# Altium PCB PCB2.PcbDoc
Units mil, origin at the board's own origin, x right, y up, seen from the top; angles counter-clockwise.
Board outline 47.27 x 1417.11 mil, 2 copper layers (Top Layer, Bottom Layer); 15 components, 40 nets, 133 pads, 11 vias.
Unrouted connection lines stored in the file: 1.
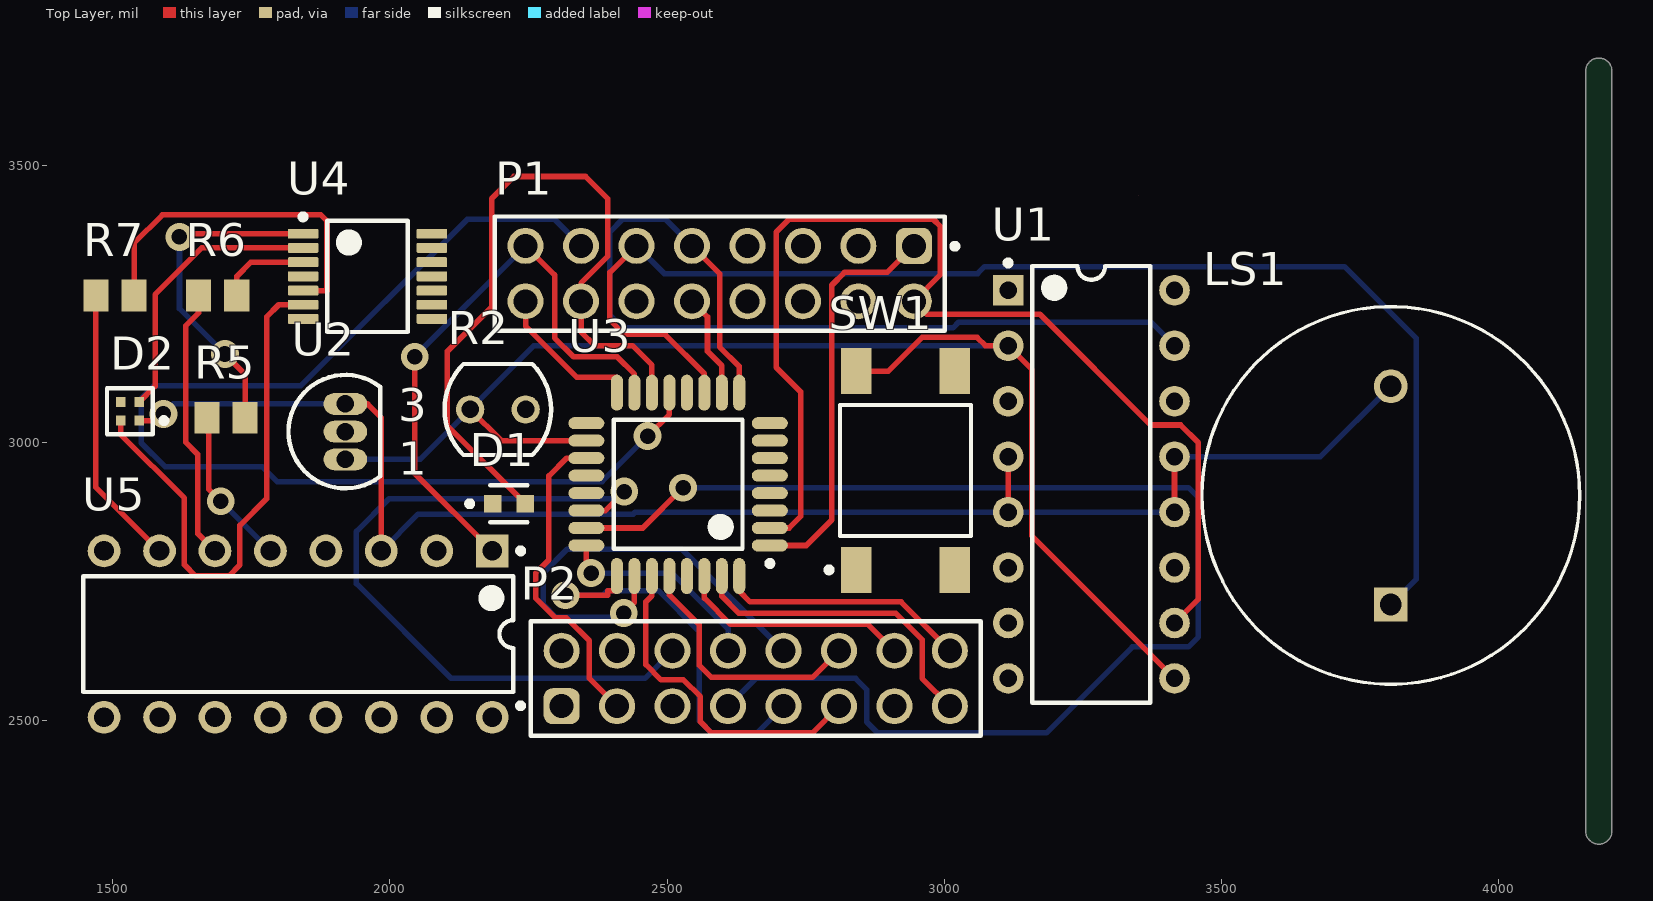
[diagram p0: Top Layer view]
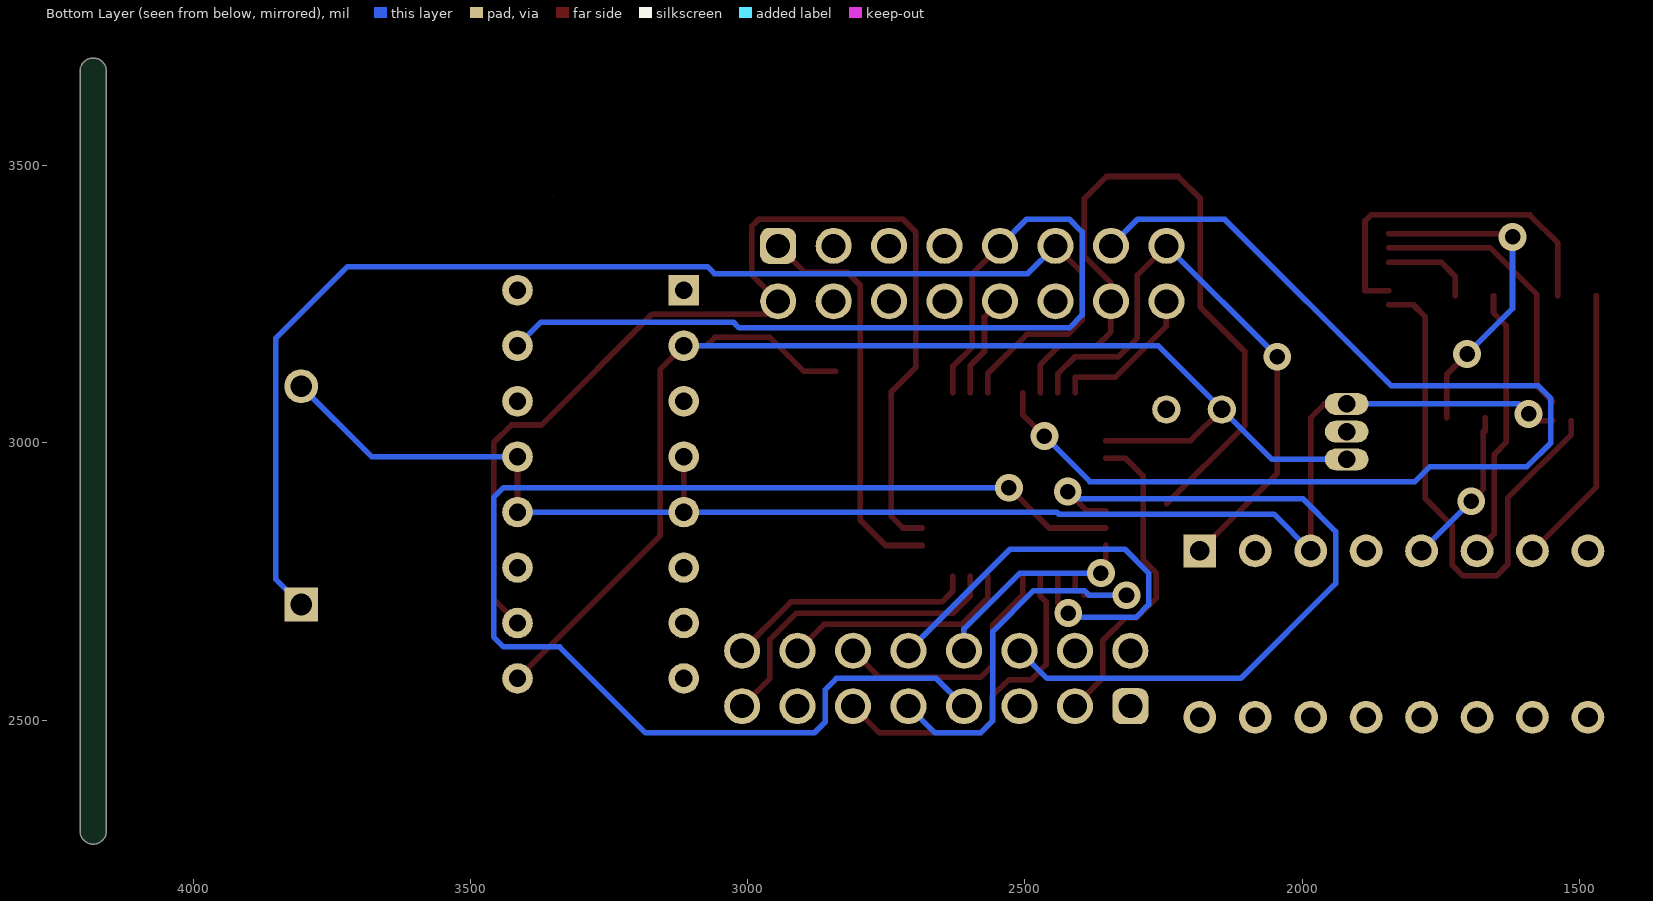
[diagram p1: Bottom Layer view, seen from below]

## Layer stack, top to bottom
Top Solder: solder mask 0.4, Solder Resist, Dk 3.5
Top Layer: signal copper 1.4
Dielectric 1: dielectric 12.6, FR-4, Dk 4.8
Bottom Layer: signal copper 1.4
Bottom Solder: solder mask 0.4, Solder Resist, Dk 3.5

## Board outline
4156.36,2300 4156.36,3670 cw(c4180,3670) 4203.64,3670 4203.64,2300 cw(c4180,2300)
cut-out: 3350,3445

## Design rules (kind name [scope] priority, off if disabled: settings)
Clearance [All] p1: gap=10 ignorepadtopadclearanceinfootprint=FALSE except(0: Arc-Hole Track-Hole SMDPad-Hole THPad-Hole Via-Hole Fill-Hole Poly-Hole Region-Hole Text-Hole)
PolygonConnect [All] p1: connectstyle=Relief reliefconductorwidth=10 reliefentries=4 polygonreliefangle="90 Angle" airgapwidth=10
RoomDefinition Sheet1 [InComponentClass('Sheet1')] p1: confinementstyle=ConfineIn formatcopy=TRUE lockcomponents=FALSE outline 1429.76,2455.35 4175,2455.35 4175,3415.35 1429.76,3415.35
RoutingVias [All] p1: holewidth=28 width=50 viastyle="Through Hole" minholewidth=28 minwidth=50 maxholewidth=28 maxwidth=50
SolderMaskExpansion [All] p1: expansion=4
Width [All] p1: maxlimit=10 minlimit=10 preferedwidth=10
30 further rules are at their usual default settings.

## Components (designator, comment, footprint, x,y, rotation, side; value= is the part's Value field where it differs from the comment)
D1 "LTST-C190GKT" FP-LTST-C190GKT-MFG 2215,2890 r0 top
D2 "SML-LX0404SIUPGUSB" FP-SML-LX0404SIUPGUSB-MFG 1531.73,3056.73 r180 top
LS1 "PS1720P02" FP-PS1720P02-MFG 3805,2905 r90 top
P1 "61301621121" 61301621121 2595,3305 r180 top
P2 "61301621121" 61301621121 2660,2575 r0 top
R2 "VT90N1" EXCE-VT90N1 2195,3060 r0 top
R5 "ERJ6ENF2200V" RESC2013X70X40NL20T20 1705,3045 r0 top
R6 "ERJ6ENF2200V" RESC2013X70X40NL20T20 1689.76,3265.35 r0 top
R7 "ERJ6ENF2200V" RESC2013X70X40NL20T20 1504.76,3265.35 r0 top
SW1 "FSM6JSMA" TECO-FSM6JSMA_V 2930,2950 r180 top
U1 "L293D" STM-L293D-16 3265,2925 r0 top
U2 "TMP36GT9Z" ADI-T-3 1920,3020 r0 top
U3 "ATmega8A-AU" 32A_N 2520,2925 r180 top
U4 "SN74HCT04PWT" PW0014A_N 1960,3300 r0 top
U5 "SN74HC139N" N0016A 1835,2655 r270 top

## Footprints (in the part's own frame and the unit in brackets; to place one, negate y for a bottom-side part, rotate by r counter-clockwise, add the part's x,y. Pads: shape width x height; smd on the part's side, far side on the other; paste and mask are expansions set on the pad)
32A_N [mm] "Thin QFP, 32-Leads, Body 7x7mm, Pitch 0.8mm, IPC Medium Density"
  oval 1.65x0.55 smd: 1(-4.2,2.8) 2(-4.2,2) 3(-4.2,1.2) 4(-4.2,0.4) 5(-4.2,-0.4) 6(-4.2,-1.2) 7(-4.2,-2) 8(-4.2,-2.8) 17(4.2,-2.8) 18(4.2,-2) 19(4.2,-1.2) 20(4.2,-0.4) 21(4.2,0.4) 22(4.2,1.2) 23(4.2,2) 24(4.2,2.8)
  oval 0.55x1.65 smd: 9(-2.8,-4.2) 10(-2,-4.2) 11(-1.2,-4.2) 12(-0.4,-4.2) 13(0.4,-4.2) 14(1.2,-4.2) 15(2,-4.2) 16(2.8,-4.2) 25(2.8,4.2) 26(2,4.2) 27(1.2,4.2) 28(0.4,4.2) 29(-0.4,4.2) 30(-1.2,4.2) 31(-2,4.2) 32(-2.8,4.2)
  silkscreen extent -4.33,-2.95 2.95,3.75, body extent -3.5,-3.5 3.5,3.5, height 1.2
61301621121 [mm] "Pin Header, pitch 2.54 mm, THT, Vertical, dual row, 16p"
  rrect50% 1.65x1.65 hole 1.1: 1(-8.89,-1.27)
  round 1.65 hole 1.1: 2(-8.89,1.27) 3(-6.35,-1.27) 4(-6.35,1.27) 5(-3.81,-1.27) 6(-3.81,1.27) 7(-1.27,-1.27) 8(-1.27,1.27) 9(1.27,-1.27) 10(1.27,1.27) 11(3.81,-1.27) 12(3.81,1.27) 13(6.35,-1.27) 14(6.35,1.27) 15(8.89,-1.27) 16(8.89,1.27)
  silkscreen extent -10.89,-2.61 10.31,2.61, body extent -10.16,-2.54 10.16,2.54, height 8.59
ADI-T-3 [mm] "TO, Flat Index; 3 In-Line, Axial Leads; Body Dia. 5.1mm; Leads 0.48 x 0.48 mm (max)"
  oval 2x1 hole 0.8: 1(0,-1.27) 2(0,0) 3(0,1.27)
  silkscreen extent -2.6,-2.6 1.6,2.6, body extent -2.6,-2.61 1.6,2.61, height 5.33
EXCE-VT90N1 [mm] "THD, 2-Leads, Body Width 4.17mm (Max), Height 2.29mm"
  round 1.3 hole 0.8: 1(-1.27,0) 2(1.27,0)
  silkscreen extent -2.44,-2.08 2.44,2.08, body extent -2.44,-2.09 2.44,2.09, height 2.29
FP-LTST-C190GKT-MFG [mm]
  rect 0.8x0.8 smd paste+0 mask+0: 1(-0.75,0) 2(0.75,0)
  silkscreen extent -1.92,-0.85 0.85,0.85, body extent -1.25,-0.55 1.25,0.55, height 0.25
FP-PS1720P02-MFG [mm]
  rect 1.55x1.55 hole 1 paste-1000 mask+0: 1(-5,0)
  round 1.55 hole 1 paste-1000 mask+0: 2(5,0)
  silkscreen extent -8.65,-8.65 8.65,8.65, body extent -8.75,-8.75 8.75,8.75, height 0.25
FP-SML-LX0404SIUPGUSB-MFG [mm]
  rect 0.45x0.45 smd paste+0 mask+0: 1(-0.425,0.425) 2(0.425,0.425) 3(0.425,-0.425) 4(-0.425,-0.425)
  silkscreen extent -1.68,-1.05 1.05,1.05, body extent -0.85,-0.85 0.85,0.85, height 0.25
N0016A [mm] "DIP, 16-Leads, Body 19.7x6.6mm, Pitch 2.54mm"
  rect 1.5x1.5 hole 0.9: 1(-3.81,8.89)
  round 1.5 hole 0.9: 2(-3.81,6.35) 3(-3.81,3.81) 4(-3.81,1.27) 5(-3.81,-1.27) 6(-3.81,-3.81) 7(-3.81,-6.35) 8(-3.81,-8.89) 9(3.81,-8.89) 10(3.81,-6.35) 11(3.81,-3.81) 12(3.81,-1.27) 13(3.81,1.27) 14(3.81,3.81) 15(3.81,6.35) 16(3.81,8.89)
  silkscreen extent -3.93,-9.85 2.65,10.32, body extent -3.95,-9.85 3.95,9.85, height 5.08
PW0014A_N [mm] "SOP, 14-Leads, Body 5.1x4.5mm, Pitch 0.65mm, IPC Medium Density"
  rrect22% 1.4x0.45 smd: 1(-2.95,1.95) 2(-2.95,1.3) 3(-2.95,0.65) 4(-2.95,0) 5(-2.95,-0.65) 6(-2.95,-1.3) 7(-2.95,-1.95) 8(2.95,-1.95) 9(2.95,-1.3) 10(2.95,-0.65) 11(2.95,0) 12(2.95,0.65) 13(2.95,1.3) 14(2.95,1.95)
  silkscreen extent -3.07,-2.55 1.85,2.85, body extent -3.21,-2.5 3.21,2.5, height 1
RESC2013X70X40NL20T20 [mm] "Chip Resistor, 2-Leads, Body 2.00x1.25mm, IPC Medium Density"
  rect 1.15x1.45 smd: 1(-0.875,0) 2(0.875,0)
  body extent -1.1,-0.72 1.1,0.72, height 0.7
STM-L293D-16 [mm] "DIP, 16-Leads, Body 20x6.85mm, Pitch 2.54mm"
  rect 1.4x1.4 hole 0.8: 1(-3.81,8.89)
  round 1.4 hole 0.8: 2(-3.81,6.35) 3(-3.81,3.81) 4(-3.81,1.27) 5(-3.81,-1.27) 6(-3.81,-3.81) 7(-3.81,-6.35) 8(-3.81,-8.89) 9(3.81,-8.89) 10(3.81,-6.35) 11(3.81,-3.81) 12(3.81,-1.27) 13(3.81,1.27) 14(3.81,3.81) 15(3.81,6.35) 16(3.81,8.89)
  silkscreen extent -3.93,-10 2.7,10.26, body extent -3.93,-10 3.93,10, height 5.1
TECO-FSM6JSMA_V [mm] "SMD, 4-Leads, Body 6x6mm, Pitch 4.5mm"
  rect 1.4x2.1 smd: 1(2.25,4.55) 2(2.25,-4.55) 3(-2.25,4.55) 4(-2.25,-4.55)
  silkscreen extent -3,-3 3.62,4.67, body extent -3,-5 3,5, height 7.11

## Part data
D1: library part CMP-22017-000005-2, "LED GREEN CLEAR CHIP SMD", Case/Package=0603, Case Code (Metric)=1608, Color=Green, Forward Current=30mA, Forward Voltage=2.1V, Lens Color=Colorless, Max Operating Temperature=85°C, Min Operating Temperature=-55°C, Package Quantity=1, Power Dissipation=100mW, Reverse Voltage=5V, Test Current=10mA, Voltage=2V, Case Code (Imperial)=0603, Depth=0.8mm, Dominant Wavelength=569nm, Height=0.8mm, Illumination Color=Green, Lead Free="Lead Free", Length=1.6mm, Lens Style=Clear, Lens Transparency=Clear, Luminous Intensity=6mcd, Mount="Surface Mount", Number of Elements=1, Number of LEDs=1, Number of Pins=2, Packaging="Tape and Reel", Power Rating=100mW, Radiation Hardening=No, Viewing Angle=130°, Wavelength=565nm, Width=0.8mm
D2: library part CMP-2000-07119-2, "LED RGB CLEAR SMD", Case/Package=0404, Case Code (Metric)=1010, Color=Blue, Forward Current=2mA, Forward Voltage=2.73V, Lens Color=Colorless, Max Operating Temperature=85°C, Min Operating Temperature=-40°C, Package Quantity=2000, Power Rating=30mW, Case Code (Imperial)=0404, Height=0.3mm, Lead Free="Lead Free", Length=1mm, Lens Style=Square, Lens Transparency=Clear, Luminous Intensity=20mcd, Mount="Surface Mount", Number of LEDs=3, Packaging="Tape and Reel", REACH SVHC="No SVHC", Test Current=2mA, Viewing Angle=120°, Wavelength=465nm, Width=1mm
LS1: library part CMP-08413-000001-1, "AUDIO PIEZO TRANSDUCER 30V TH", Frequency=2kHz, Manufacturer="TDK Corporation", Package=0, Temperature="-10°C to +70°C", Temperature Range High=+70°C, Temperature Range Low=-10°C, Automotive=No, Category=Speak, ComponentLink2Description=Datasheet, ComponentLink2URL=https://product.tdk.com/info/en/catalog/datasheets/piezoelectronic_buzzer_ps_en.pdf, Device Class L1=Electromechanical, Device Class L2="Audio Products", Device Class L3=Buzzers, Digikey Description="AUDIO PIEZO TRANSDUCER 30V TH", Height=8.3mm, Lead Free=Yes, Manufacturer Part Number=PS1720P02, Mouser Description="Audio Indicators & Alerts Round 17mmx8mm 2 kHz Vin=3V", Octopart=https://octopart.com/ps1720p02-tdk-154429, RoHS=TRUE, Standoff Height=0.5mm
P1 P2: library part CMP-1502-01097-3, Color=Black, Contact Resistance=20m?, Current Rating=3A, Max Operating Temperature=105°C, Min Operating Temperature=-40°C, Operating Supply Voltage=250V, Connector Type="Male Pin", Contact Material=Copper, Contact Mating Length=5.9944mm, Contact Plating=Gold, Gender=Male, Height=8.89mm, Lead Pitch=2.54mm, Mount="Through Hole", NexarPartId=32855550, Number of Contacts=16, Number of Pins=16, Number of Positions=16, Number of Rows=2, Orientation=Vertical, Packaging=Bulk, Pitch=2.54mm, REACH SVHC=Unknown, RoHS=Compliant, Row Spacing=2.54mm, Termination=Solder, Voltage Rating=250V
R2: library part CMP-2000-07406-1, "Photoconductive Resistor, 200 kOhm, 100 V, 80 mW, -40 to 75 degC, 2-Pin THD, RoHS", Dark Resistance=200kohm, Manufacturer="Excelitas Technology", Operating Temperature Max=75°C, Operating Temperature Min=-40°C, Package Description="2-Pin Through Hole Device, Body Width 4.17 mm (Max), Height 2.29 mm", Power Rating=80mW, Resistance @ Lux=12kohm, Resistor Case Style=-, Voltage Rating=100V, Datasheet URL=http://datasheet.octopart.com/VT90N1-Excelitas-datasheet-10388451.pdf, Datasheet Version=09/2006, Manufacturer URL=http://www.excelitas.com/Pages/Index.aspx, Mounting Technology=ThroughHole, Package Reference=VT90N1, Packaging=Each, Product Range=-, SVHC=Cadmiumchloride(15-Jun-2015)
R5 R6 R7: library part CMP-2001-00044-1, Manufacturer=Panasonic, Part Number=ERJ6ENF2200V
SW1: library part CMP-2000-07503-1, "Switch, SPST, 24 V, -35 to 85 degC, 4-Pin SMD, RoHS, Tape and Reel", Case\/Package=SMD/SMT, Contact Current Rating=50mA, Contact Resistance=100mOhm, Insulation Resistance=100MOhm, Manufacturer="TE Connectivity", Max Operating Temperature=85degC, Max Voltage Rating (DC)=12V, Min Operating Temperature=-35degC, Operating Force=1.57N, Package Description="4-Pin Surface Mount Device, Body 6 x 6 mm, Pitch 4.5 mm", Package Quantity=750, Voltage Rating=24V, Actuator Length=3.4mm, Actuator Material=Polyamide, Contact Material=CopperAlloy, Contact Plating=Silver, Current Rating=50mA, Datasheet URL=http://www.te.com/commerce/DocumentDelivery/DDEController?Action=showdoc&DocId=Customer+Drawing%7F2-1437565-7%7FV%7Fpdf%7FEnglish%7FENG_CD_2-1437565-7_V.pdf%7F4-1437565-9, Datasheet Version="Rev. V, 02/2015", Electrical Life=100000Cycles, ELV=Compliant, Illumination Type=Illuminated, Lead Free=LeadFree, Length=6mm, Manufacturer URL=http://www.te.com/, Mechanical Life=100000Cycles, Mount=SurfaceMount, Mounting Technology=SurfaceMount, Orientation=Straight, Package Reference=FSM6JSMA, Packaging=LoosePiece, REACH SVHC=Unknown, RoHSCompliant=true, Switch Travel=0.25mm, Termination=GullWing, Throw Configuration=SPST, Voltage Rating (DC)=24V, Width=6mm
U1: library part CMP-2000-06524-1, "Push-Pull Four Channel Driver with Diode, 4.5 to 36 V, -40 to 150 degC, 16-Pin PDIP, RoHS, Tube", Current - Output / Channel=600mA, Current - Peak Output=1.2A, Manufacturer=STMicroelectronics, On-State Resistance=-, Operating Temperature=-40°C~150°C, Package / Case="16-DIP(0.300\",7.62mm)", Package Description="16-Pin Thru-Hole Dual-In-Line, Body 20 x 6.85 mm, Pitch 2.54 mm", Package Reference=DIP-16, Standard Package=25, Supplier Device Package=16-PowerDIP, Voltage - Supply=4.5V~36V, Category=IntegratedCircuits(ICs), Datasheet URL=http://www.st.com/st-web-ui/static/active/en/resource/technical/document/datasheet/CD00000059.pdf, Datasheet Version=07/2003, Dynamic Catalog=HalfBridge, Family=PMIC-MOSFET,BridgeDrivers-InternalSwitch, Input Type=Non-Inverting, Manufacturer URL=http://www.st.com/, Mounting Technology=ThroughHole, Mounting Type=ThroughHole, Number of Outputs=4, Other Names=497-2936-5, Other Related Documents=L293DViewAllSpecifications, Packaging=Tube, PartNumber=L293D, Series=-, Type=HalfBridge
U2: library part CMP-0887-00067-1, "Low Voltage Temperature Sensor, 2.7 to 5.5 V Supply, Industrial, 3-pin TO92 (T-3), Tray", Manufacturer="Analog Devices", Supply Voltage Range="2.7 to 5.5 V", Code_JEDEC=TO-226-AA, ComponentLink1Description="Manufacturer URL", ComponentLink1URL=http://www.analog.com/en/index.html, ComponentLink2Description=Datasheet, ComponentLink2URL=http://www.analog.com/static/imported-files/data_sheets/TMP35_36_37.pdf, ComponentLink3Description="Package Specification", ComponentLink3URL=http://www.analog.com/static/imported-files/packages/PKG_PDF/TO-92(T)/T_3.pdf, ComponentLink4Description="Product URL", ComponentLink4URL=http://www.analog.com/en/mems-sensors/digital-temperature-sensors/tmp36/products/product.html, DatasheetVersion="Rev. F", Mounting Technology="Through Hole", PackageDescription="3-Pin Plastic Header-Style Package, 1.27 mm Pitch", PackageReference=T-3, PackageVersion="042208-A, 04/2008", Packing=Tray, PartNumber=TMP36GT9Z
U3: library part CMP-0095-00219-2, "8-bit AVR Microcontroller, 2.7-5.5V, 16MHz, 8KB Flash, 512 Bytes EEPROM, 1KB SRAM, 32-pin TQFP, Industrial Grade (-40°C to 85°C)", Code_JEDEC=MS-026-ABA, ComponentLink1Description="Manufacturer URL", ComponentLink1URL=http://www.atmel.com/, ComponentLink2Description="ATmega8A Datasheet", ComponentLink2URL=http://www.atmel.com/dyn/resources/prod_documents/doc8159.pdf, ComponentLink3Description="ATmega8A Summary", ComponentLink3URL=http://www.atmel.com/dyn/resources/prod_documents/8159S.pdf, DatasheetVersion="revD, Feb-2011", PackageDescription="32-Lead, 7x7x1.0 mm Body, 0.8mm Lead Pitch, Thin Profile Plastic Quad Flat Package (TQFP)", PackageReference=32A, PackageVersion="revC, Oct-2010", RevisionNote="DatasheetVersion & PackageVersion updated. URLs added."
U4: library part CMP-1615-00087-3, "Hex Inverters, PW0014A, SMALL T&R", F @ Nom Voltage(Max)(Mhz)=25, Generic Part Number=SN74HCT04, ICC @ Nom Voltage(Max)(mA)=0.02, Manufacturer="Texas Instruments", Operating Temperature Range(C)="-40 to 85", Rating=Catalog, tpd @ Nom Voltage(Max)(ns)=23, Voltage(Nom)(V)=5, Bits(#)=6, Code_JEDEC=MO-153, DatasheetVersion=SCLS042D, Input Type=TTL, Output Drive (IOL/IOH)(Max)(mA)=-4/4, Output Type=CMOS, PackageReference=PW0014A, Schmitt Trigger=No, Technology Family=HCT, VCC(Max)(V)=5.5, VCC(Min)(V)=4.5
U5: library part CMP-1633-00660-2, "Dual 2-Line To 4-Line Decoders/Demultiplexers, N0016A, TUBE", F @ Nom Voltage(Max)(Mhz)=28, Generic Part Number=SN74HC139, ICC @ Nom Voltage(Max)(mA)=0.08, Manufacturer="Texas Instruments", Operating Temperature Range(C)="-40 to 85", Rating=Catalog, tpd @ Nom Voltage(Max)(ns)=44, Voltage(Nom)(V)=3.3,5, Bits(#)=4, Channels(#)=2, Code_JEDEC=MS-001, Configuration=2:4, DatasheetVersion=SCLS108D, Function=Decoder/Demultiplexer, Input Type=LVTTL/CMOS, Output Drive (IOL/IOH)(Max)(mA)=5.2/-5.2, Output Type=CMOS, PackageReference=N0016A, Schmitt Trigger=No, Technology Family=HC, Type=Standard, VCC(Max)(V)=6, VCC(Min)(V)=2

## Via types
v1: diameter 50, hole 28, Top Layer to Bottom Layer, 11 vias

## Nets (pads, with @x,y where several pads share a name; then routed paths per layer and width w, separated by ;. In a path a pad name is that pad's centre, name@x,y a point inside that pad or via, vN(x,y) a via of type N, cw(c..) or ccw(c..) an arc to the next point about the centre after c; other vN are vias at no path point)
+5: R2.1 SW1.2 U1.2 U1.9 U2.1 U3.18 | length 2542.1
  Top Layer w10: R2.1 2201.26,3003.74 U3.18 ; SW1.2 2899.13,3129.13 2960,3190 3059,3190 3074,3175 U1.2 3158,3132 3158,2832 U1.9
  Bottom Layer w10: U2.1 2055,2970 R2.1 2260,3175 U1.2
BUZZER: LS1.1 P1.11 U3.11 | length 2382.7
  Top Layer w10: P1.11 2397,3307 2397,3221 2422.71,3195.29 2496.4,3195.29 2567.24,3124.45 U3.11
  Bottom Layer w10: P1.11 2495,3305 3059.88,3305 3072.44,3317.56 3721.44,3317.56 3851,3188 3851,2754.15 LS1.1
DOOR_INT: P1.1 U3.1 | length 731.3
  Top Layer w10: U3.1 2751,2814.76 2797,2860.76 2797,3284 2820,3307 2897,3307 P1.1
DOOR_MOTOR_IN1: P1.2 U1.10 U3.2 | length 2022.5
  Top Layer w10: U3.2 2720,2846.26 2741,2867.26 2741,3092 2697,3136 2697,3380 2720,3403 2980,3403 2993,3390 2993,3303 P1.2 2968,3232 3172,3232 3372,3032 3426,3032 3458,3000 3458,2718 U1.10
DOOR_MOTOR_IN2: P1.9 U1.15 U3.9 | length 1676.9
  Top Layer w10: P1.9 2595,3305 2595,3173 2630.24,3137.76 U3.9
  Bottom Layer w10: P1.9 2497,3403 2420,3403 2397,3380 2397,3230 2420,3207 3015.44,3207 3026,3217.56 3372.44,3217.56 U1.15
DOOR_MOTOR_OUT1: U1.11
DOOR_MOTOR_OUT2: U1.14
FAAN_PWM_EN: P1.13 U3.13 | length 2097.2
  Top Layer w10: v1(2465,3012) 2504.25,3051.25 U3.13
  Bottom Layer w10: P1.13 2297,3403 2140,3403 1840,3103 1575,3103 1552,3080 1552,3000 1595,2957 1770,2957 1797,2930 2383,2930 v1(2465,3012)
FAN_OUT1: U1.3
FAN_OUT2: U1.6
FAN_PWM_EN: U1.1
GND: D2.1 LS1.2 U1.4 U1.5 U1.12 U1.13 U2.3 U5.3 | length 2800.9
  Top Layer w10: D2.1 1580,3040 v1(1592,3052) ; U2.3 1960,3070 1985,3045 U5.3 ; U1.5 U1.4 ; U1.12 U1.13
  Bottom Layer w10: v1(1592,3052) 1610,3070 U2.3 ; U5.3 2051.4,2871.4 2439,2871.4 2442.6,2875 U1.5 U1.12 ; U1.13 3678.15,2975 LS1.2
keypad_1: P2.11 U3.27 | length 609.4
  Top Layer w10: U3.27 2472.76,2724.09 2462,2713.34 2462,2600 2489.52,2572.48 2529.67,2572.48 2560,2542.15 2560,2497 2580,2477 2762,2477 P2.11
keypad_2: P2.12 U3.28 | length 463.9
  Top Layer w10: U3.28 2504.25,2725.75 2558,2672 2558,2599 2580,2577 2762,2577 P2.12
KEYPAD_3: P1.10 U3.10 | length 186.9
  Top Layer w10: P1.10 2573,3227 2573,3165 2598.74,3139.26 U3.10
keypad_A: P2.7 U3.23 | length 2406.9
  Top Layer w10: U3.23 2456.26,2846.26 v1(2529,2919)
  Bottom Layer w10: v1(2529,2919) 3440,2919 3458,2901 3458,2650 3440,2632 3339,2632 3184,2477 2880,2477 2860,2497 2860,2555 2840,2575 2660,2575 P2.7
keypad_B: P2.8 U3.24 | length 382.2
  Top Layer w10: U3.24 2354,2814.76 2354,2774 v1(2363,2765)
  Bottom Layer w10: v1(2363,2765) 2509.36,2765 2610,2664.36 P2.8
keypad_C: P2.9 U3.25 | length 744.2
  Top Layer w10: v1(2317,2725) 2392.76,2725 2392.76,2733.34 2409.76,2733.34 U3.25
  Bottom Layer w10: v1(2317,2725) 2384.42,2725 2392.76,2733.34 2484.66,2733.34 2558,2660 2558,2499 2580,2477 2662,2477 P2.9
keypad_D: P2.10 U3.26 | length 816.1
  Top Layer w10: v1(2422,2693) 2441.26,2712.26 U3.26
  Bottom Layer w10: v1(2422,2693) 2414,2685 2300,2685 2277,2708 2277,2765 2320,2808 2527,2808 P2.10
LIGHTING: D1.2 P1.14 U3.14 | length 1345.6
  Top Layer w10: D1.2 2104,3030.53 2104,3165 2184,3245 2184,3440 2224,3480 2353,3480 2393,3440 2393,3335.85 2345,3287.85 P1.14 2345,3200 2369.71,3175.29 2437.46,3175.29 2472.76,3140 U3.14
NetD1_1: D1.1
NetD2_2: D2.2 U4.6 | length 965.9
  Top Layer w10: D2.2 1515,3015 1630,2900 1630,2780 1650,2760 1710,2760 1730,2780 1730,2851 1778,2899 1778,3226.82 1800,3248.82 U4.6
NetD2_3: D2.3 U4.4
NetD2_4: D2.4 U4.2 | length 507.2
  Top Layer w10: D2.4 1577,3102 1577,3267.22 1660.96,3351.18 U4.2
NetLabel24: P2.3 U3.19 | length 578.6
  Top Layer w10: U3.19 2319.24,2972.24 2287.16,2940.16 2287.16,2789.05 2263,2764.89 2263,2720 2298.11,2684.89 2318.15,2684.89 2360,2643.04 2360,2575 P2.3
NetLabel25: P2.6 U3.22 | length 1350.9
  Top Layer w10: U3.22 2388.76,2877.76 v1(2423,2912)
  Bottom Layer w10: v1(2423,2912) 2410,2899 1999,2899 1940,2840 1940,2746 2111,2575 2460,2575 P2.6
NetR1_2: SW1.3
NetR2_2: R2.2
NetR5_1: R5.1 U5.5 | length 289.4
  Top Layer w10: R5.1 1670.55,3021 1674,3021 1674,2916 v1(1695.55,2894.45)
  Bottom Layer w10: v1(1695.55,2894.45) U5.5
NetR5_2: R5.2 U4.1 | length 600.3
  Top Layer w10: v1(1621,3371) 1626.77,3376.77 U4.1 ; v1(1703,3160) 1739.45,3123.55 R5.2
  Bottom Layer w10: v1(1621,3371) 1621,3242 v1(1703,3160)
NetR6_1: R6.1 U5.6 | length 492
  Top Layer w10: R6.1 1655.31,3234 1632,3210.69 1632,3001 1654,2979 1654,2836 U5.6
NetR6_2: R6.2 U4.3 | length 164.9
  Top Layer w10: R6.2 1724.21,3300 1749.8,3325.59 U4.3
NetR7_1: R7.1 U5.7 | length 507.9
  Top Layer w10: R7.1 1470.31,2919.69 U5.7
NetR7_2: R7.2 U4.5 | length 636.8
  Top Layer w10: R7.2 1539.21,3360 1590.21,3411 1876,3411 1887,3400 1887,3274.41 U4.5
"PIR SENSOR": P2.16 U3.32 | length 451.4
  Top Layer w10: U3.32 2630.24,2732.48 2649.72,2713 2922,2713 P2.16
RGB_A: P1.15 U3.15 U5.1 | length 1082.7
  Top Layer w10: v1(2045,3155) 2045,2945 U5.1 ; P1.15 2297.52,3302.48 2297.52,3189 2331.52,3155 2410,3155 2441.26,3123.74 U3.15
  Bottom Layer w10: v1(2045,3155) P1.15
RGB_B: P1.16 U3.16 | length 275.3
  Top Layer w10: P1.16 2245,3210.29 2337.46,3117.84 2409.76,3117.84 U3.16
TMP36: U2.2
USART_RX: P2.14 U3.30 | length 421.8
  Top Layer w10: U3.30 2567.24,2720 2614.76,2672.48 2862.52,2672.48 P2.14
USART_TX: P2.15 U3.31 | length 570.7
  Top Layer w10: U3.31 2598.74,2723.42 2629.16,2693 2912,2693 2960,2645 2960,2575 P2.15
pads on no net: P1.3 P1.4 P1.5 P1.6 P1.7 P1.8 P1.12 P2.1 P2.2 P2.4 P2.5 P2.13 SW1.1 SW1.4 U1.7 U1.8 U1.16 U3.3 U3.4 U3.5 U3.6 U3.7 U3.8 U3.12 U3.17 U3.20 U3.21 U3.29 U4.7 U4.8 U4.9 U4.10 U4.11 U4.12 U4.13 U4.14 U5.2 U5.4 U5.8 U5.9 U5.10 U5.11 U5.12 U5.13 U5.14 U5.15 U5.16

## Text inside footprints (layer, text, board x,y; h text height)
U2: Top Overlay "3" at 2015.32,3038.39 h59.05; Top Overlay "1" at 2015.32,2942.09 h59.05